# EAGLE board tlacitka (EAGLE 9.5.1)
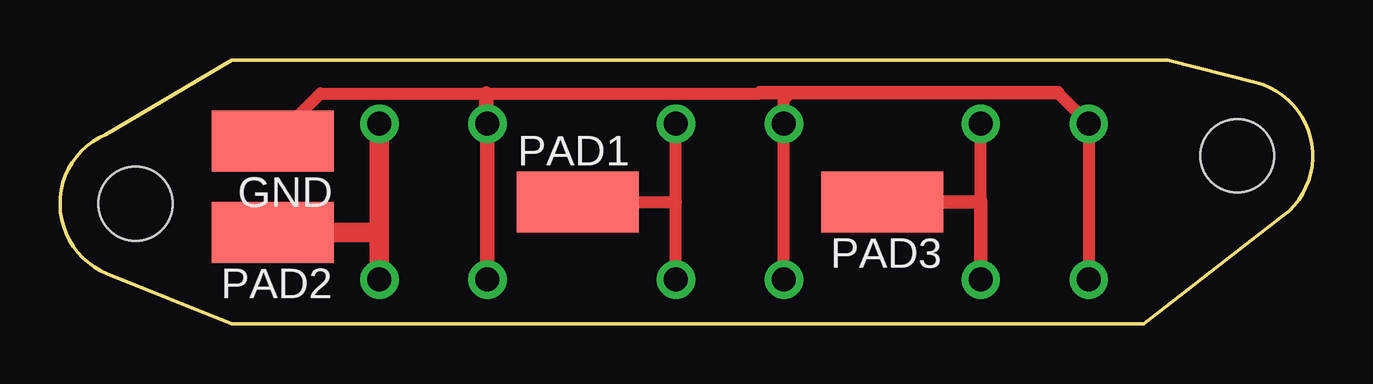
[diagram p0: board, top side]
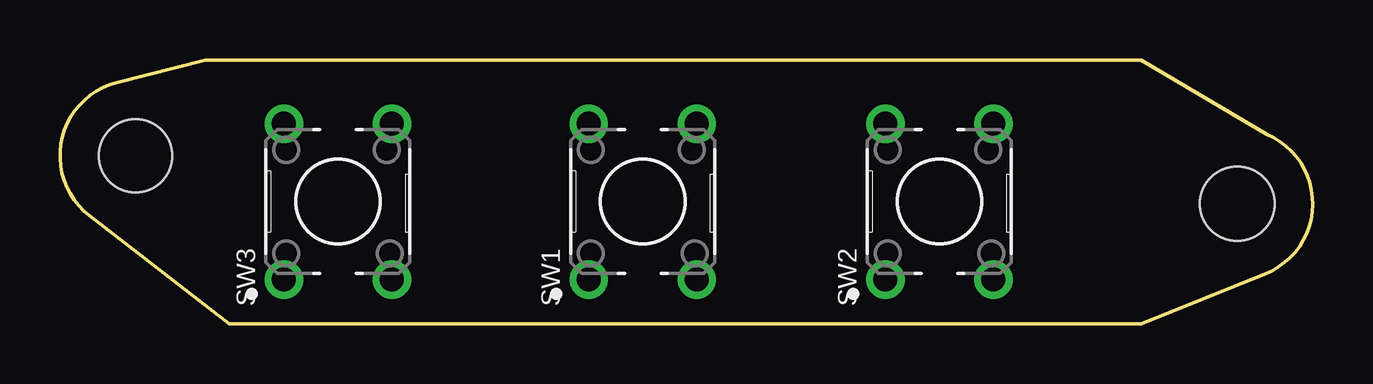
[diagram p1: board, bottom side, seen from below]

Size 52.2 x 11 mm. Coordinates in mm from the lower left corner, seen from the top.
Outline: 7.15,0 45.15,0 50.98,4.51 arc128 49.84,10.05 46.15,11 7.15,11 1.91,7.89 arc135 1.98,2.08 7.15,0
Copper layers (1*16): Top 0.035mm / dielectric 1.5mm / Bottom 0.035mm
Design rules "default *": minimum track width 6mil, minimum drill 0.35mm, track to track 6mil, track to pad 6mil, pad to pad 6mil, via to via 6mil, smd to smd 6mil, copper to edge 30mil, drill to drill 6mil, minimum pad ring 10mil, minimum via ring 8mil, stop-mask expansion 4mil, vias tented up to drill 0mil, thermal gap 10mil
Holes 3.1 mm at 3.15,5
Holes 3.06 mm at 49.05,7

## Footprints (pad centres in the part's own frame; a part is rotated, then mirrored left to right if it is on the bottom)
SMD2,54-5,08 = smd 2.54 x 5.08: 1 0,0
B3F-1000 = drill 1 pad 1.6: 1 -3.25,2.25; 2 3.25,2.25; 3 -3.25,-2.25; 4 3.25,-2.25

## Placement (x,y rotation side)
GND  [SMD2,54-5,08]  8.86,7.62 90 top
PAD1  [SMD2,54-5,08]  21.56,5.08 270 top
PAD2  [SMD2,54-5,08]  8.86,3.81 90 top
PAD3  [SMD2,54-5,08]  34.26,5.08 90 top
SW1  B3F-1000  [B3F-1000]  27.91,5.09 90 bottom
SW2  B3F-1000  [B3F-1000]  15.56,5.09 90 bottom
SW3  B3F-1000  [B3F-1000]  40.61,5.09 90 bottom

## Library data of the parts
GND PAD1-PAD3 = wirepad
SW1-SW3 = Switch; CREATED_BY: PCBLayout.com; DIGI_KEY_PART_NUMBER: SW400-ND; MANUFACTURER: Omron Electronics Inc-EMC Div; MPN: B3F-1000; PACKAGE: SPST-NO

## Nets
N$1: PAD1.1 SW1.3 SW1.4
N$2: PAD2.1 SW2.3 SW2.4
N$3: GND.1 SW1.1 SW1.2 SW2.1 SW2.2 SW3.1 SW3.2
N$4: PAD3.1 SW3.3 SW3.4

## Tracks (layer width: path | path; a pad name or v marks a point on that pad's centre or on a via)
N$1
  Top 0.508: SW1.3 25.66,5.08 | 25.66,5.08 SW1.4 | PAD1.1 25.66,5.08
N$2
  Top 0.813: SW2.4 13.31,3.81 | 13.31,3.81 SW2.3 | PAD2.1 13.31,3.81
N$3
  Top 0.508: GND.1 10.85,9.6 17.75,9.6 29.16,9.6 29.18,9.63 | 41.58,9.63 SW3.2 SW3.1 | SW1.1 SW1.2 30.16,9.34 30.45,9.63
  Top 0.559: 29.18,9.63 30.45,9.63 41.58,9.63
  Top 0.61: SW2.1 SW2.2 17.75,8.39 17.75,9.6
N$4
  Top 0.508: 38.36,5.08 SW3.4
  Top 0.559: SW3.3 38.36,5.08 PAD3.1